# Altium PCB AOT_Board.PcbDoc
Units mil, origin at the board's own origin, x right, y up, seen from the top; angles counter-clockwise.
Board outline 6000 x 4000 mil, 2 copper layers (Top Layer, Bottom Layer); 6 components, 0 nets, 45 pads, 0 vias.
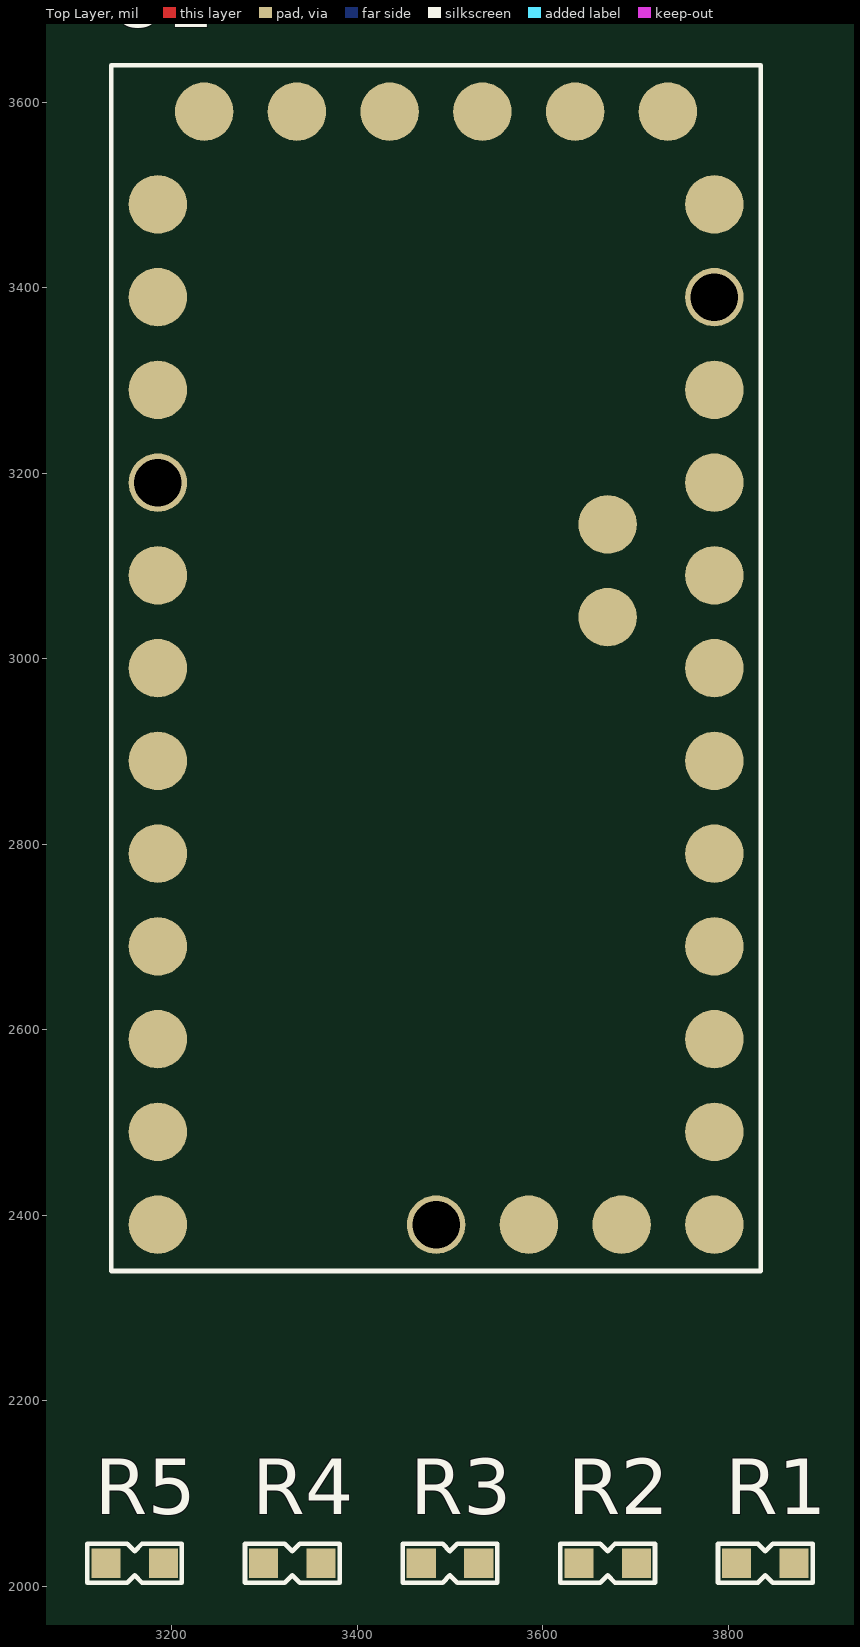
[diagram p0: Top Layer view]
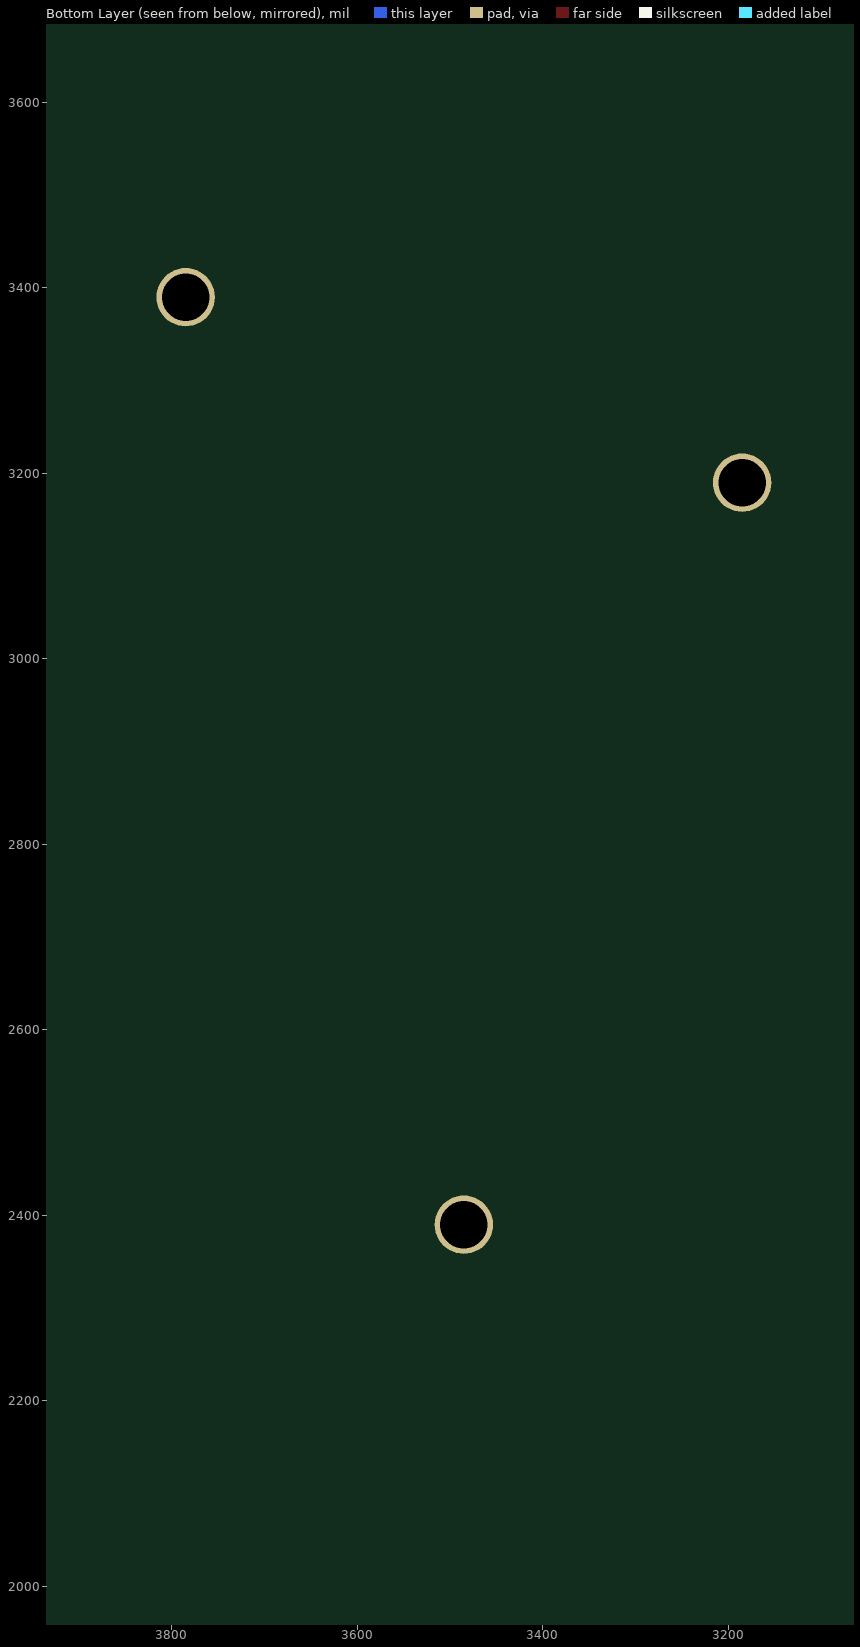
[diagram p1: Bottom Layer view, seen from below]

## Layer stack, top to bottom
Top Solder: solder mask 0.4, Solder Resist, Dk 3.5
Top Layer: signal copper 1.4
Dielectric 1: dielectric 12.6, FR-4, Dk 4.8
Bottom Layer: signal copper 1.4
Bottom Solder: solder mask 0.4, Solder Resist, Dk 3.5

## Board outline
1000,1000 7000,1000 7000,5000 1000,5000

## Design rules (kind name [scope] priority, off if disabled: settings)
Clearance [All] p1: gap=10 ignorepadtopadclearanceinfootprint=FALSE
PolygonConnect [All] p1: connectstyle=Relief reliefconductorwidth=10 reliefentries=4 polygonreliefangle="90 Angle" airgapwidth=10
RoutingVias [All] p1: holewidth=28 width=50 viastyle="Through Hole" minholewidth=28 minwidth=50 maxholewidth=28 maxwidth=50
SolderMaskExpansion [All] p1: expansion=4 istentingtop=FALSE
Width [All] p1: maxlimit=10 minlimit=10 preferedwidth=10
30 further rules are at their usual default settings.

## Components (designator, comment, footprint, x,y, rotation, side; value= is the part's Value field where it differs from the comment)
R1 "4.7K" 0603R1608 3840,2025 r0 top
R2 "4.7K" 0603R1608 3670,2025 r0 top
R3 "4.7K" 0603R1608 3500,2025 r0 top
R4 "4.7K" 0603R1608 3330,2025 r0 top
R5 "4.7K" 0603R1608 3160,2025 r0 top
U1 "ProMini" Pro_Mini_smd 3485,2990 r0 top

## Footprints (in the part's own frame and the unit in brackets; to place one, negate y for a bottom-side part, rotate by r counter-clockwise, add the part's x,y. Pads: shape width x height; smd on the part's side, far side on the other; paste and mask are expansions set on the pad)
0603R1608 [mm]
  rect 0.8x0.8 smd: 1(-0.787,0) 2(0.787,0)
  silkscreen extent -1.3,-0.53 1.3,0.53, body extent -0.8,-0.39 0.8,0.41, height 0.3
Pro_Mini_smd [mm]
  round 1.6 smd: 1(-7.62,12.7) 2(-7.62,10.16) 3(-7.62,7.62) 5(-7.62,2.54) 6(-7.62,0) 7(-7.62,-2.54) 8(-7.62,-5.08) 9(-7.62,-7.62) 10(-7.62,-10.16) 11(-7.62,-12.7) 12(-7.62,-15.24) 14(2.54,-15.24) 15(5.08,-15.24) 16(7.62,-15.24) 17(7.62,-12.7) 18(7.62,-10.16) 19(7.62,-7.62) 20(7.62,-5.08) 21(7.62,-2.54) 22(7.62,0) 23(4.699,1.397) 24(7.62,2.54) 25(4.699,3.937) 26(7.62,5.08) 27(7.62,7.62) 29(7.62,12.7) 30(6.35,15.24) 31(3.81,15.24) 32(1.27,15.24) 33(-1.27,15.24) 34(-3.81,15.24) 35(-6.35,15.24)
  round 1.6 hole 1.3: 4(-7.62,5.08) 13(0,-15.24) 28(7.62,10.16)
  silkscreen extent -8.89,-16.51 8.89,16.51, body extent -8.89,-16.51 8.89,16.51, height 3.37

## Part data
R1 R2 R3 R4 R5: library part Res1, "Resistor", LatestRevisionDate=17-Jul-2002, LatestRevisionNote="Re-released for DXP Platform.", PackageDescription="Axial Device, Thru-Hole; 2 Leads; 0.3 in Pin Spacing", PackageReference=AXIAL-0.3, Published=8-Jun-2000, Publisher="Altium Limited"
U1: library part Pro-Mini

## Nets (pads, with @x,y where several pads share a name; then routed paths per layer and width w, separated by ;. In a path a pad name is that pad's centre, name@x,y a point inside that pad or via, vN(x,y) a via of type N, cw(c..) or ccw(c..) an arc to the next point about the centre after c; other vN are vias at no path point)
pads on no net: R1.1 R1.2 R2.1 R2.2 R3.1 R3.2 R4.1 R4.2 R5.1 R5.2 U1.1 U1.2 U1.3 U1.4 U1.5 U1.6 U1.7 U1.8 U1.9 U1.10 U1.11 U1.12 U1.13 U1.14 U1.15 U1.16 U1.17 U1.18 U1.19 U1.20 U1.21 U1.22 U1.23 U1.24 U1.25 U1.26 U1.27 U1.28 U1.29 U1.30 U1.31 U1.32 U1.33 U1.34 U1.35